# EAGLE board _HC_Thesis_PCB.92a26f0b-b337-44cd-ba37-0ec76b757aee_LV0 (EAGLE 9.7.0)
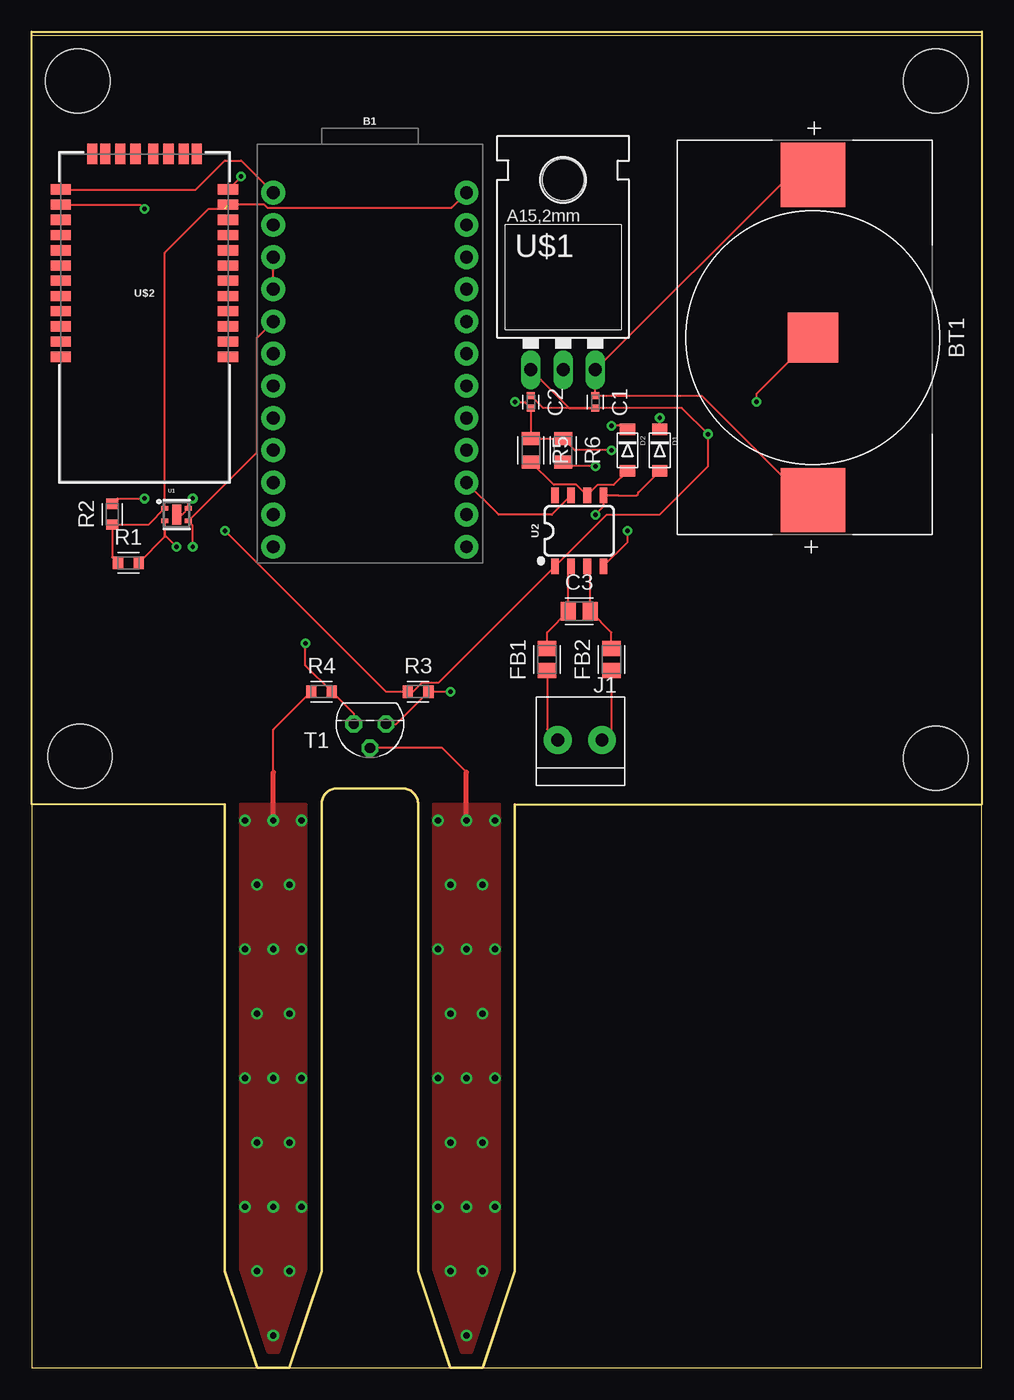
[diagram p0: board, top side]
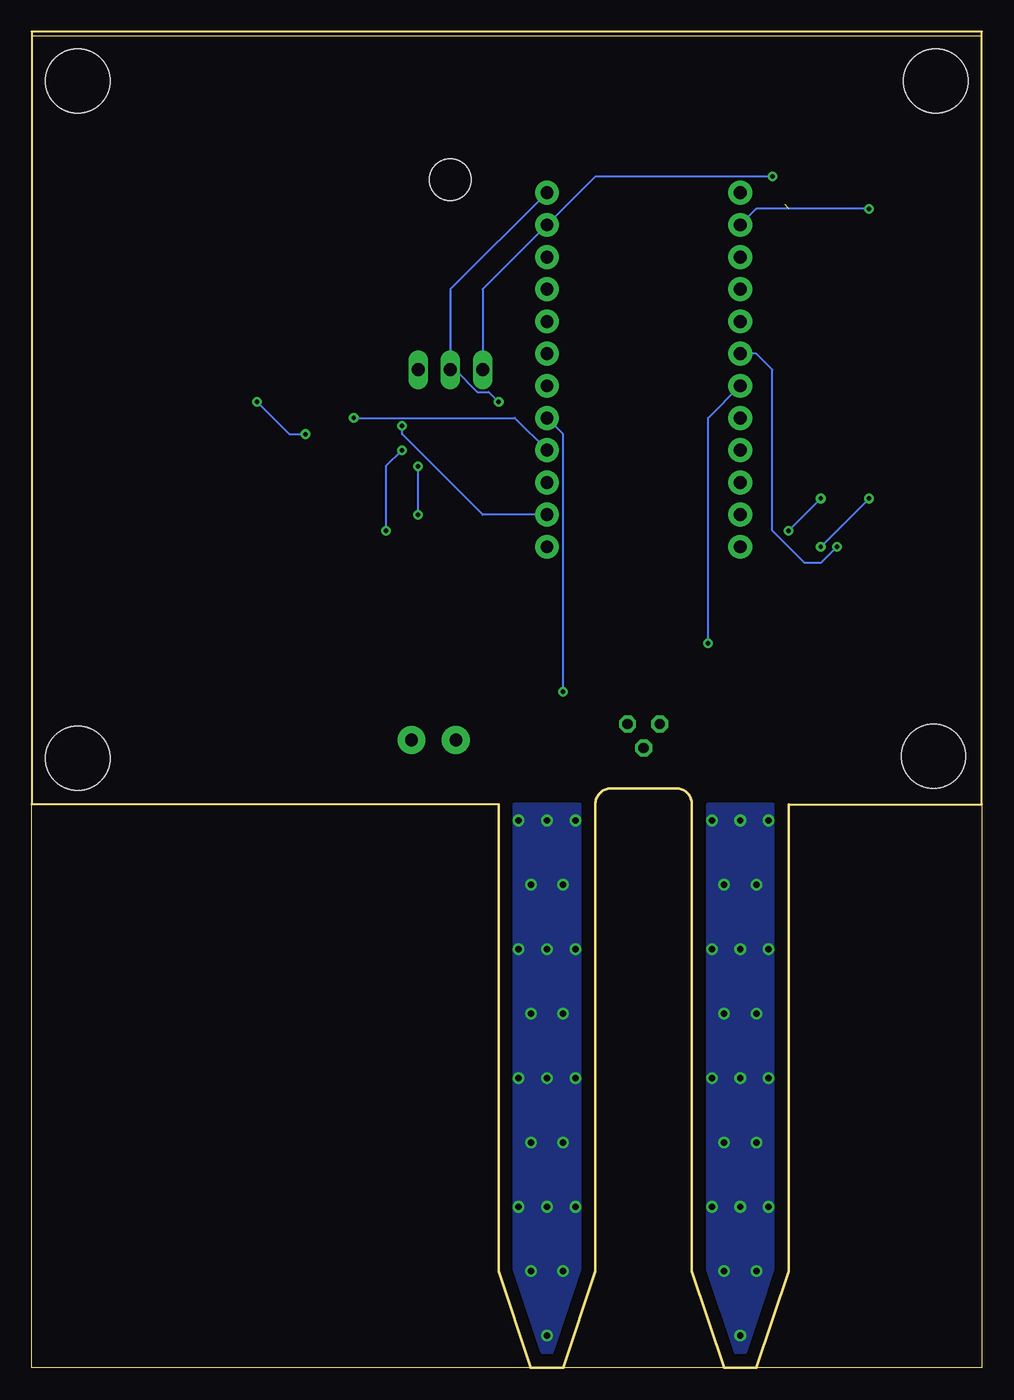
[diagram p1: board, bottom side, seen from below]

Size 74.93 x 105.41 mm. Coordinates in mm from the lower left corner, seen from the top.
Outline: 0,44.45 0,105.08 74.91,105.08 74.91,0 0,0 0,44.45
Outline: 0,44.45 15.24,44.45 15.24,7.62 17.78,0 20.32,0 22.86,7.62 22.86,44.45 arc-90 24.13,45.72 29.21,45.72 arc-90 30.48,44.45 30.48,7.62 33.02,0 35.56,0 38.1,7.62 38.1,44.45 74.93,44.45 74.93,105.41 0,105.41 0,44.45
Copper layers (1*16): Top 0.035mm / dielectric 1.5mm / Bottom 0.035mm
Design rules "default": minimum track width 6mil, minimum drill 0.35mm, track to track 6mil, track to pad 6mil, pad to pad 6mil, via to via 6mil, smd to smd 6mil, copper to edge 40mil, drill to drill 6mil, minimum pad ring 10mil, minimum via ring 8mil, stop-mask expansion 4mil, vias tented up to drill 0mil, thermal gap 10mil
Holes 5.08 mm at 3.63,101.52 71.3,101.52 71.3,48.08 3.81,48.26

## Footprints (pad centres in the part's own frame; a part is rotated, then mirrored left to right if it is on the bottom)
SPARKFUN_PRO_MICRO = drill 1.016 pad 1.88: 1 -7.62,12.7; 2 -7.62,10.16; 3 -7.62,7.62; 4 -7.62,5.08; 5 -7.62,2.54; 6 -7.62,0; 7 -7.62,-2.54; 8 -7.62,-5.08; 9 -7.62,-7.62; 10 -7.62,-10.16; 11 -7.62,-12.7; 12 -7.62,-15.24; 13 7.62,-15.24; 14 7.62,-12.7; 15 7.62,-10.16; 16 7.62,-7.62; 17 7.62,-5.08; 18 7.62,-2.54; 19 7.62,0; 20 7.62,2.54; 21 7.62,5.08; 22 7.62,7.62; 23 7.62,10.16; 24 7.62,12.7
BAT_3002 = smd 3.96 x 3.96: N 0,0.65 | smd 5.08 x 5.08: P 12.825,0.65; P1 -12.825,0.65
CAPC1005X60 = smd 0.56 x 0.629: 1 -0.485,0; 2 0.485,0
CAPC2012X110 = smd 1.165 x 1.465: 1 -0.875,0; 2 0.875,0
SOD-123FL = smd 0.91 x 1.22: A 1.637,0; C -1.637,0
BEADC2012X105N = smd 1.165 x 1.465: 1 -0.875,0; 2 0.875,0
1X2-3.5MM = drill 1 pad 2.184: 1 1.8,0; 2 -1.7,0
RESC1608X60 = smd 0.799 x 0.974: 1 -0.815,0; 2 0.815,0
RESC2012X65 = smd 1.031 x 1.42: 1 -0.919,0; 2 0.919,0
TO92 = drill 0.813 octagon: 1 1.27,0; 2 0,1.905; 3 -1.27,0
SHTC3 = smd 0.55 x 0.35: 1 -0.925,0.5; 2 -0.925,-0.5; 3 0.925,-0.5; 4 0.925,0.5 | smd 0.7 x 1.6: 5 0,0
SO08 = smd 0.6 x 1.2: 1 -1.905,-2.8; 2 -0.635,-2.8; 3 0.635,-2.8; 4 1.905,-2.8; 5 1.905,2.8; 6 0.635,2.8; 7 -0.635,2.8; 8 -1.905,2.8
78XXL = drill 1.016 long: GND 0,-3.81; IN -2.54,-3.81; OUT 2.54,-3.81 | hole 3.302: 0,11.176
RN41 = smd 0.8 x 1.6: 1 -6.6,-6.6; 2 -5.4,-6.6; 3 -4.2,-6.6; 4 -3,-6.6; 5 -1.8,-6.6; 6 -0.6,-6.6; 7 0.6,-6.6; 8 1.8,-6.6; 9 3,-6.6; 10 4.2,-6.6; 11 5.4,-6.6; 12 6.6,-6.6; 13 6.6,6.6; 14 5.4,6.6; 15 4.2,6.6; 16 3,6.6; 17 1.8,6.6; 18 0.6,6.6; 19 -0.6,6.6; 20 -1.8,6.6; 21 -3,6.6; 22 -4.2,6.6; 23 -5.4,6.6; 24 -6.6,6.6 | smd 1.6 x 0.8: 28 9.4,3.1; 29 9.4,-3.1; 30 9.4,4.122; 31 9.4,1.9; 32 9.4,0.7; 33 9.4,-0.7; 34 9.4,-1.9; 35 9.4,-4.122

## Placement (x,y rotation side)
B1  SPARKFUN_PRO_MICRO  [SPARKFUN_PRO_MICRO]  26.67,80.01 0 top
BT1  CR2032 - 3V  [BAT_3002]  60.96,81.28 270 top
C1  100nF  [CAPC1005X60]  44.45,76.2 270 top
C2  10uF  [CAPC1005X60]  39.37,76.2 270 top
C3  0.01uF  [CAPC2012X110]  43.18,59.69 0 top
D1  1N4148  [SOD-123FL]  49.53,72.39 270 top
D2  1N4148  [SOD-123FL]  46.99,72.39 270 top
FB1  FERRITE_BEAD  [BEADC2012X105N]  40.64,55.88 90 top
FB2  FERRITE_BEAD  [BEADC2012X105N]  45.72,55.88 90 top
J1  1X2-3.5MM  [1X2-3.5MM]  43.18,49.53 0 top
R1  2200  [RESC1608X60]  7.62,63.5 0 top
R2  2200  [RESC1608X60]  6.35,67.35 90 top
R3  10k  [RESC1608X60]  30.48,53.34 0 top
R4  100  [RESC1608X60]  22.86,53.34 0 top
R5  [RESC2012X65]  39.37,72.39 270 top
R6  [RESC2012X65]  41.91,72.39 270 top
T1  2N3904  [TO92]  26.67,50.8 180 top
U1  SHTC3  [SHTC3]  11.43,67.31 0 top
U2  MAX31855K  [SO08]  43.18,66.04 0 top
U$1  V_REG_LD1117VXX  [78XXL]  41.91,82.55 0 top
U$2  BLUETOOTH-RN-41"  [RN41]  8.89,86.36 90 top

## Library data of the parts
B1 = SparkFun-Boards
BT1 = Battery_Holder; CATEGORY: Battery-Holder; CELL_DIAMETER: 20mm; DESCRIPTION: Battery Retainer Coin, 20.0mm 1 Cell SMD (SMT) Tab; MANUFACTURER: Keystone Electronics; MPN: 3002; PART_STATUS: ACTIVE; ROHS_COMPLIANT: COMPLIANT; SERIES: -; SUB_CATEGORY: Holder; TYPE: Coin Cell
C1-C3 = Capacitor; CATEGORY: Capacitor
D1 D2 J1 = adafruit
FB1 FB2 = Filter; CATEGORY: Filter; SUB-CATEGORY: Ferrite bead
R1-R6 = Resistor; CATEGORY: Resistor; SUB-CATEGORY: Fixed
T1 = transistor
U1 = SparkFun-Sensors; PROD_ID: IC-14840
U2 = SparkFun-IC-Conversion; PROD_ID: IC-12578
U$1 = SparkFun-IC-Power
U$2 = SparkFun-RF; PROD_ID: IC-11844; SF_ID: WRL-12575

## Nets
GND: B1.3 B1.4
N$1: B1.24 C2.2 R1.1 R2.1 R5.1 R6.1 U1.1 U2.4 U$1.GND U$2.11
N$2: BT1.P BT1.P1 C1.1 U$1.OUT
N$3: B1.23 BT1.N C1.2 C2.1 R3.1 U1.4 U1.5 U2.1 U$1.IN U$2.12
N$4: C3.1 FB1.2 U2.2
N$5: B1.1 U$2.13
N$6: B1.2 U$2.14
N$7: B1.7 R4.2 T1.1
N$8: B1.17 R3.2 T1.3
N$9: C3.2 FB2.2 U2.3
N$10: B1.5 R2.2 U1.3
N$11: B1.6 R1.2 U1.2
N$12: D2.A R5.2 U2.6
N$13: D1.A R6.2 U2.5
N$14: B1.15 U2.7
N$15: B1.16 D1.C
N$16: B1.14 D2.C
N$17: FB1.1 J1.2
N$18: FB2.1 J1.1
PROBE1: T1.2
PROBE2: R4.1
VCC: B1.21

## Tracks (layer width: path | path; a pad name or v marks a point on that pad's centre or on a via)
GND
  Top 0.152: B1.4 B1.3
N$1  (via drill 0.35)  (1 unrouted)
  Top 0.152: U$2.11 18.35,91.76 18.57,91.54 33.12,91.54 B1.24 | R1.1 6.35,63.95 R2.1 9.23,66.54 U1.1 10.5,87.98 13.97,91.44 15.24,91.44 | v38.1,76.2 38.89,76.2 C2.2 R5.1 R6.1 42.83,72.39 v45.72,72.39 | v46.99,66.04 46.99,65.15 U2.4
  Bottom 0.152: v38.1,76.2 38.89,76.99 39.78,76.99 41.53,78.74 U$1.GND 41.91,85.09 B1.24 | v45.72,72.39 46.99,71.12 v46.99,66.04
N$2
  Top 0.152: BT1.P 61.09,68.45 52.86,76.69 C1.1 U$1.OUT 59.81,94.11 BT1.P1
N$3  (via drill 0.35)
  Top 0.152: U$2.12 v16.51,93.98 | U1.5 11.86,67.31 U1.4 12.36,68.23 v12.7,68.58 | v15.24,66.04 27.94,53.34 R3.1 30.09,53.34 30.8,54.06 32.09,54.06 U2.1 45.34,67.31 49.53,67.31 53.34,71.12 v53.34,73.66 51.28,75.72 C1.2 | C1.2 40.34,75.72 C2.1 | C1.2 42.39,75.72 U$1.IN | BT1.N 57.15,76.82 v57.15,76.2
  Bottom 0.152: v16.51,93.98 30.48,93.98 B1.23 39.37,85.09 U$1.IN | v12.7,68.58 v15.24,66.04 | v57.15,76.2 54.61,73.66 v53.34,73.66
N$4
  Top 0.152: FB1.2 40.64,58.02 C3.1 42.3,63 U2.2
N$5
  Top 0.152: U$2.13 12.95,92.96 15.24,95.25 16.51,95.25 B1.1
N$6  (via drill 0.35)
  Top 0.152: U$2.14 8.57,91.76 v8.89,91.44
  Bottom 0.152: v8.89,91.44 17.78,91.44 B1.2
N$7  (via drill 0.35)
  Top 0.152: T1.1 25.4,51.61 R4.2 21.59,55.42 v21.59,57.15
  Bottom 0.152: v21.59,57.15 21.59,74.93 B1.7
N$8  (via drill 0.35)
  Top 0.152: T1.3 28.75,50.8 R3.2 v33.02,53.34
  Bottom 0.152: v33.02,53.34 33.02,73.66 B1.17
N$9
  Top 0.152: FB2.2 45.72,58.02 C3.2 44.05,63 U2.3
N$10  (via drill 0.35)
  Top 0.152: R2.2 6.76,68.58 v8.89,68.58 | v12.7,64.77 12.7,66.47 U1.3 17.78,72.23 17.78,81.28 B1.5
  Bottom 0.152: v8.89,68.58 v12.7,64.77
N$11  (via drill 0.35)
  Top 0.152: R1.2 10.5,65.57 U1.2 10.5,65.7 v11.43,64.77
  Bottom 0.152: v11.43,64.77 12.7,63.5 13.97,63.5 16.51,66.04 16.51,78.74 17.78,80.01 B1.6
N$12
  Top 0.152: R5.2 41.17,69.67 42.94,69.67 43.77,68.84 U2.6 44.64,69.67 45.91,69.67 D2.A
N$13  (via drill 0.35)
  Top 0.152: D1.A 47.83,69.05 47.83,68.93 47.7,68.8 46.28,68.8 46.24,68.84 U2.5 45.09,67.95 v44.45,67.31 | v44.45,71.12 42.26,71.12 R6.2
  Bottom 0.152: v44.45,67.31 v44.45,71.12
N$14
  Top 0.152: U2.7 41.02,67.31 36.83,67.31 B1.15
N$15  (via drill 0.35)
  Top 0.152: D1.C v49.53,74.93
  Bottom 0.152: v49.53,74.93 36.83,74.93 B1.16
N$16  (via drill 0.35)
  Top 0.152: D2.C 46.69,74.32 v45.72,74.32
  Bottom 0.152: B1.14 39.37,67.31 45.72,73.66 v45.72,74.32
N$17
  Top 0.152: FB1.1 40.64,50.37 J1.2
N$18
  Top 0.152: FB2.1 45.72,50.27 J1.1
PROBE1  (via drill 0.51)
  Top 0.152: 34.29,46.99 32.39,48.89 T1.2
  Top 0.406: v34.29,43.18 34.29,46.99
  other vias: 34.29,33.02 34.29,22.86 34.29,12.7 33.02,7.62 35.56,7.62 34.29,2.54 33.02,38.1 35.56,38.1 35.56,27.94 33.02,27.94 33.02,17.78 35.56,17.78 36.53,43.18 36.53,33.02 36.53,22.86 36.53,12.7 32.05,12.7 32.05,22.86 32.05,33.02 32.05,43.18
  pour Top: 38.23,44.58 30.35,44.58 30.35,-0.13 38.23,-0.13
  pour Bottom (isolate 0.305): 38.2,44.55 30.38,44.55 30.38,-0.1 38.2,-0.1
PROBE2  (via drill 0.51)
  Top 0.152: 19.05,46.99 19.05,50.34 R4.1
  Top 0.406: v19.05,43.18 19.05,46.99
  other vias: 19.05,33.02 19.05,22.86 19.05,12.7 20.32,7.62 17.78,7.62 19.05,2.54 17.78,17.78 20.32,17.78 17.78,27.94 20.32,27.94 17.78,38.1 20.32,38.1 16.81,43.18 16.81,33.02 16.81,22.86 16.81,12.7 21.29,12.7 21.29,22.86 21.29,33.02 21.29,43.18
  pour Top: 22.99,44.58 15.11,44.58 15.11,-0.13 22.99,-0.13
  pour Bottom: 22.99,44.58 15.11,44.58 15.11,-0.13 22.99,-0.13